# Altium PCB lab2_yakimenko_boost.PcbDoc
Units mm, origin at the board's own origin, x right, y up, seen from the top; angles counter-clockwise.
Board outline 43.1 x 26.1 mm, 2 copper layers (Top Layer, Bottom Layer), stack 1.57 mm thick; 17 components, 10 nets, 53 pads, 67 vias.
Unrouted connection lines stored in the file: 8.
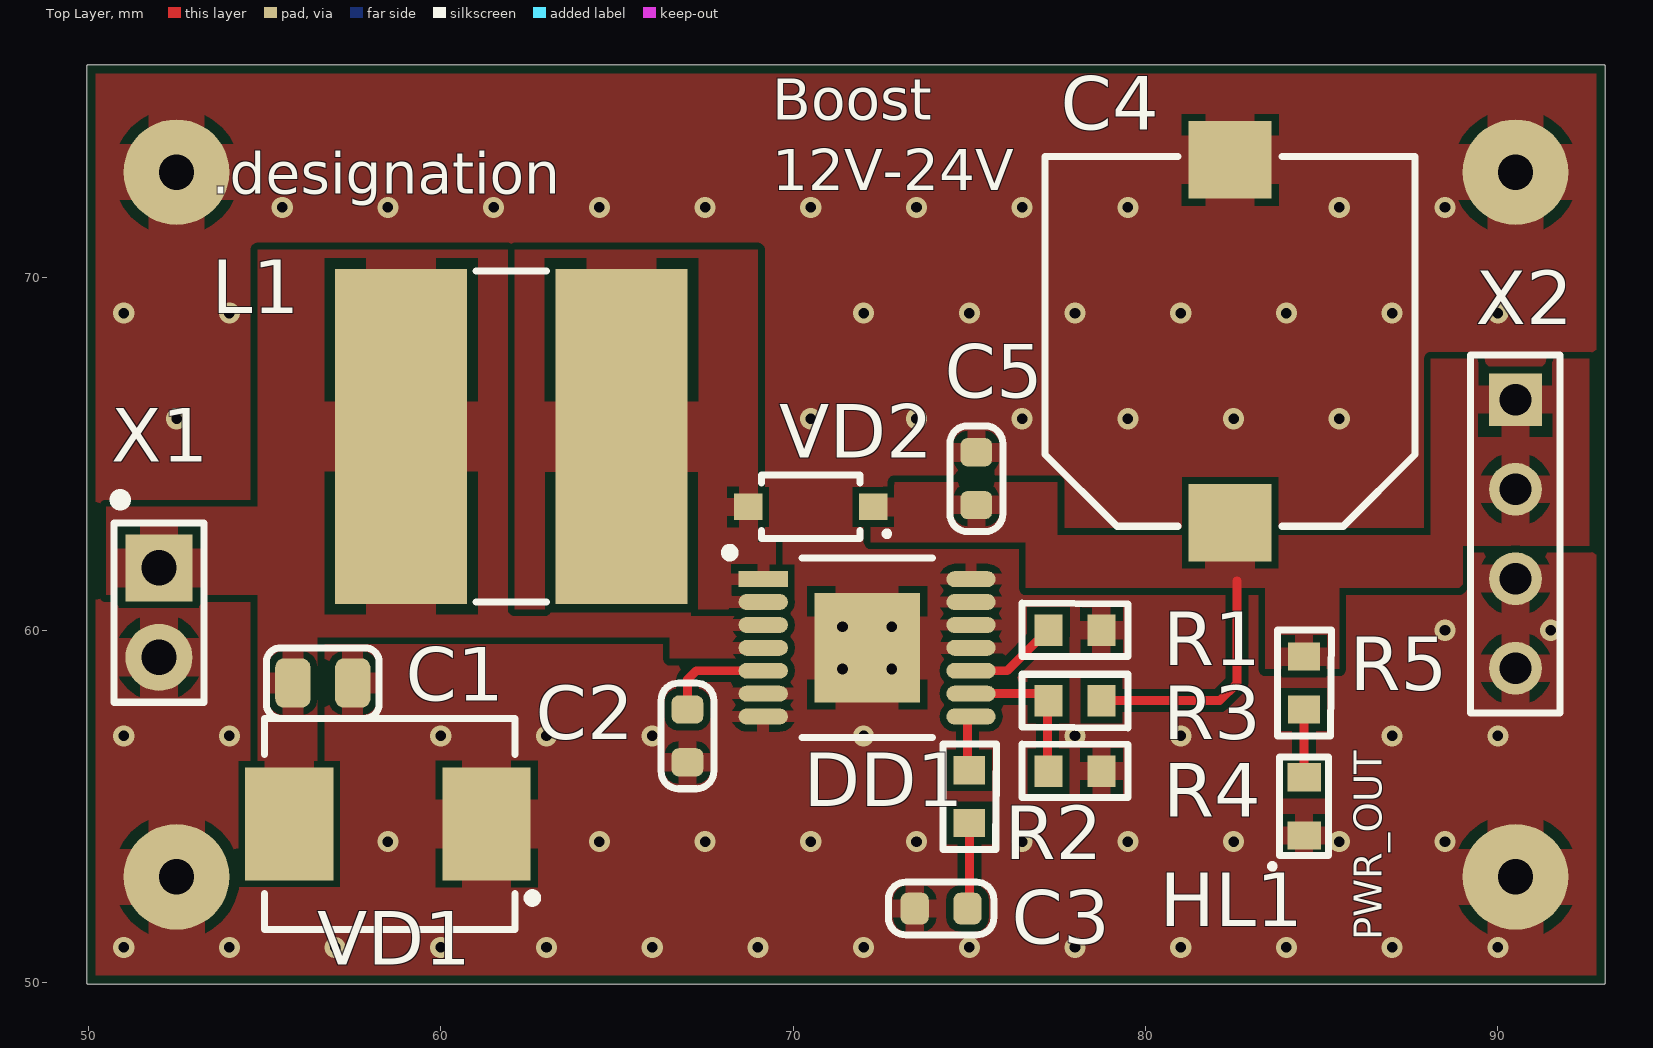
[diagram p0: Top Layer view]
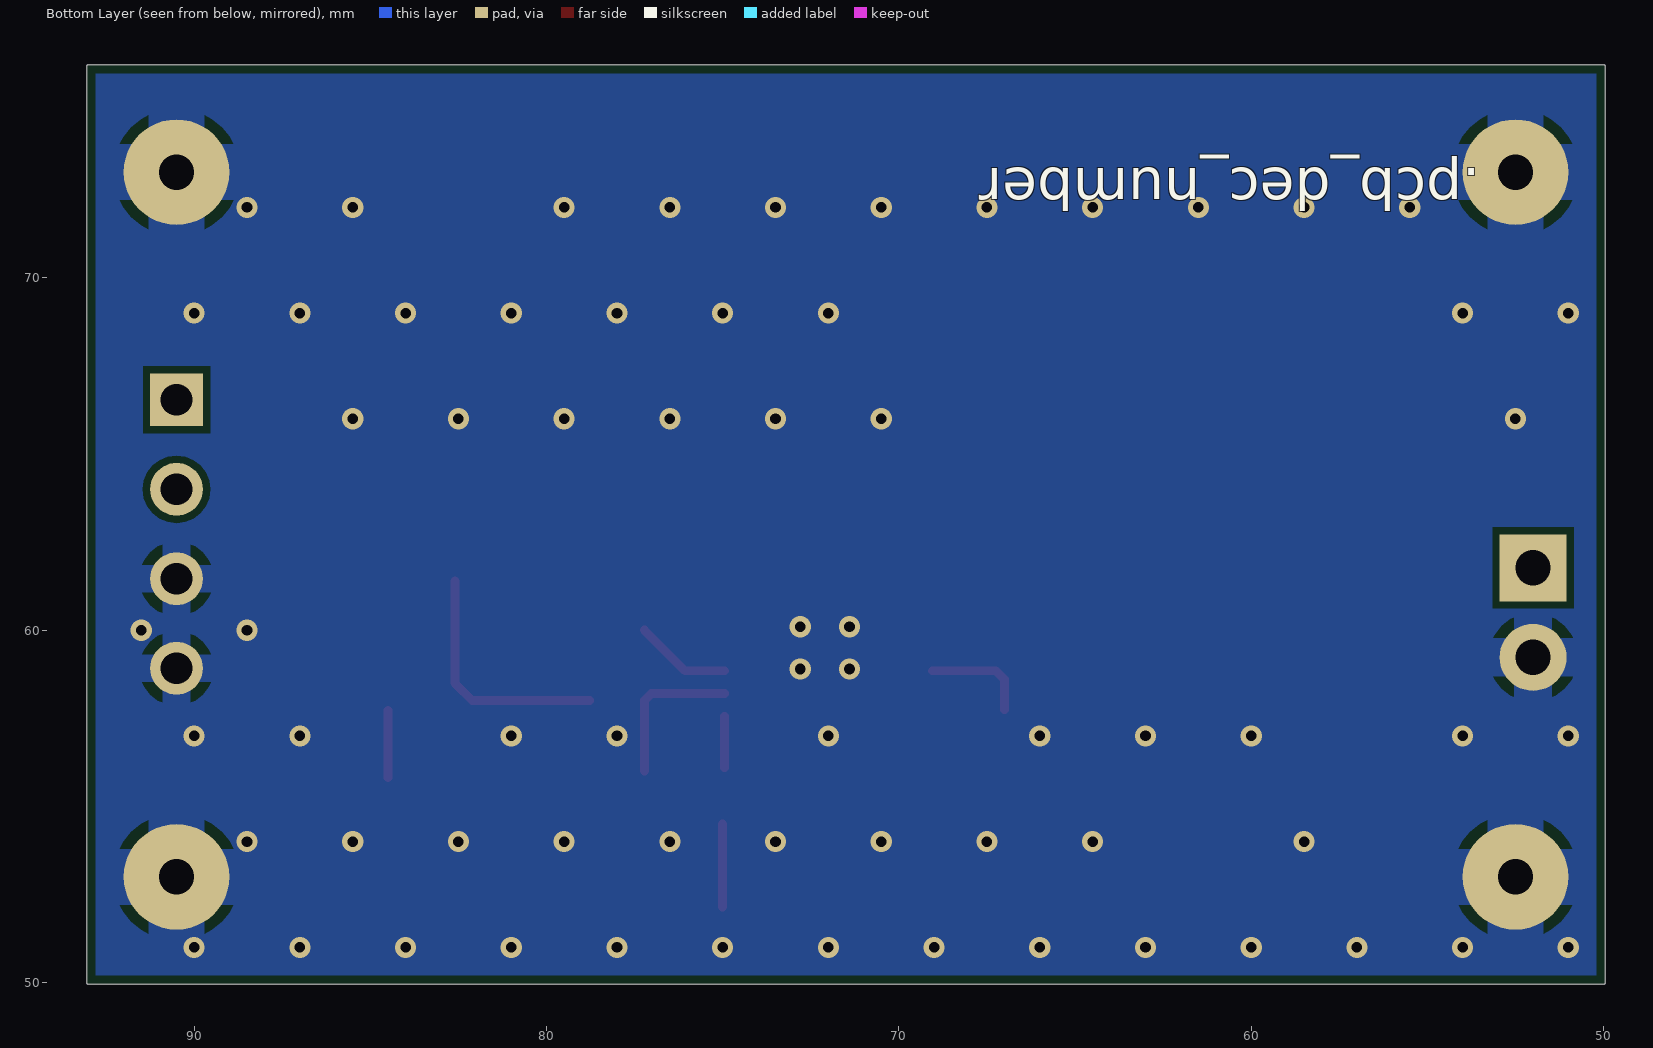
[diagram p1: Bottom Layer view, seen from below]
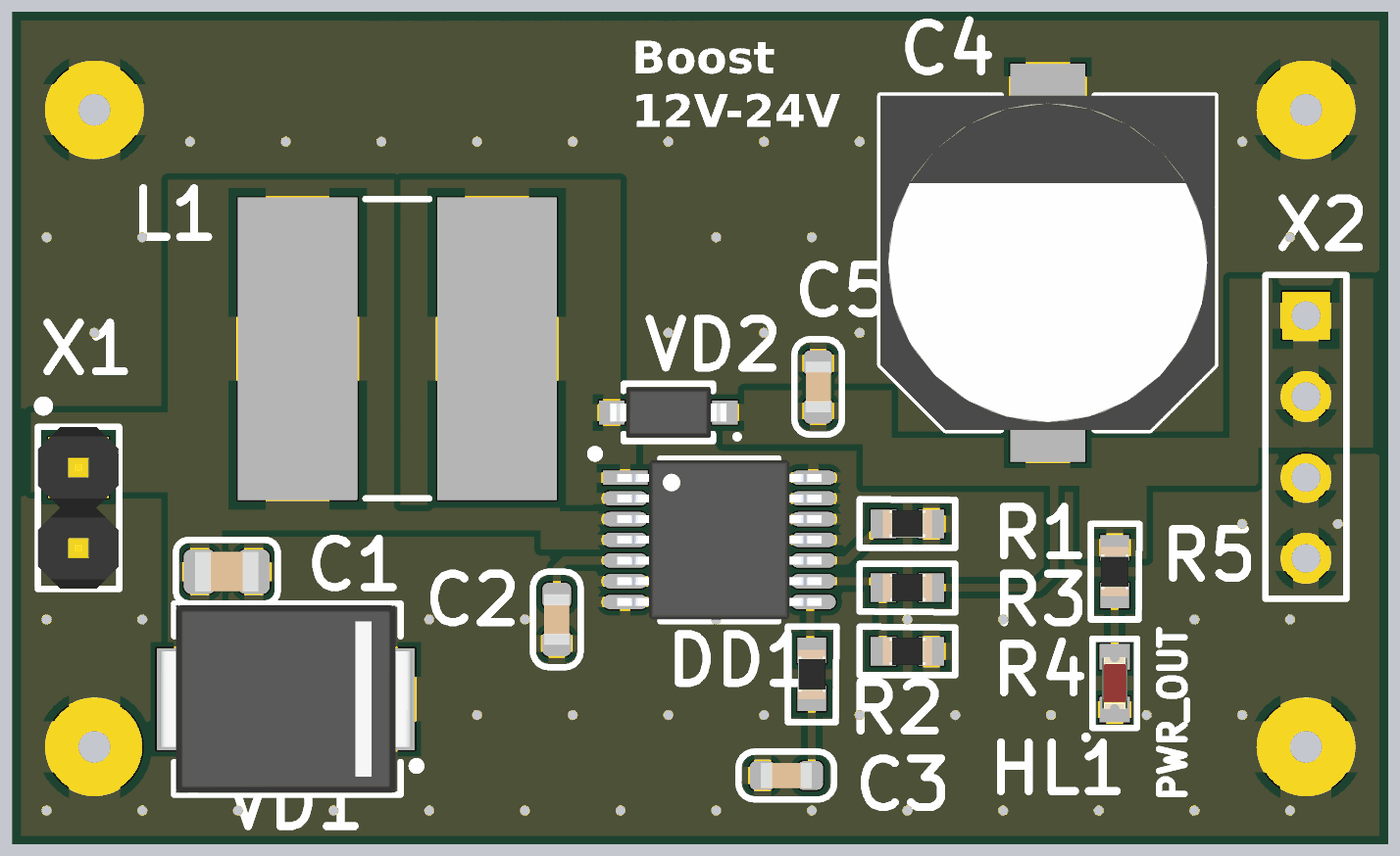
[diagram p2: 3D render of the assembled board from above, using the file's embedded part models]

## Layer stack, top to bottom
Top Solder: solder mask 0.0102, Solder Resist, Dk 3.5
Top Layer: signal copper 0.035
Core 1: core 1.5, FR4, Dk 4.6
Bottom Layer: signal copper 0.035
Bottom Solder: solder mask 0.0102, Solder Resist, Dk 3.5

## Board outline
50,49.95 cw(c50,50) 49.95,50 49.95,76 cw(c50,76) 50,76.05 93,76.05 cw(c93,76) 93.05,76 93.05,50 cw(c93,50) 93,49.95

## Design rules (kind name [scope] priority, off if disabled: settings)
AcuteAngle min_acute_angle [OnCopper] p1: minimum=3.50000000000000E+0001 checktracksonly=FALSE // Минимальный угол между примитивами топологии
BoardOutlineClearance board_outline_clearance_std [NOT (OnLayer('Bottom Overlay') OR OnLayer('Top Overlay'))] p1: gap=0.25 ignorepadtopadclearanceinfootprint=FALSE except(0: Arc-SplitContinuation Track-SplitContinuation SMDPad-SplitContinuation THPad-SplitContinuation Via-SplitContinuation Fill-SplitContinuation Poly-SplitContinuation Region-SplitContinuation Text-SplitContinuation) // Отступ элементов топологии от края фрезеруемой печатной платы
Clearance clearance_outer_35um_std [OnTopLayer OR OnBottomLayer] p1: gap=0.2 ignorepadtopadclearanceinfootprint=TRUE except(0.25: Arc-Hole Track-Hole SMDPad-Hole THPad-Hole Via-Hole Fill-Hole Poly-Hole Region-Hole Text-Hole) // Зазоры на внешних слоях
Clearance clearance_inner_35um_std [NOT (OnTopLayer Or OnBottomLayer)] p2: gap=0.2 ignorepadtopadclearanceinfootprint=FALSE except(0.25: Arc-Hole Track-Hole SMDPad-Hole THPad-Hole Via-Hole Fill-Hole Poly-Hole Region-Hole Text-Hole) // Зазоры на внутренних слоях
ComponentClearance [All] p1: gap=0 collisioncheckmode=3 verticalgap=0 showdistances=FALSE
DiffPairsRouting diff_pairs_routing [All] p1: maxlimit=0.127 minlimit=0.127 mostfreqgap=0.127 toplayer_minwidth=0.143 toplayer_maxwidth=0.143 toplayer_prefwidth=0.143 bottomlayer_minwidth=0.143 bottomlayer_maxwidth=0.143 bottomlayer_prefwidth=0.143 impedanceprofiledriven=TRUE impedanceprofileid={FD46899E-B5A2-4EF5-A302-5D2DB6A51F35} maxuncoupledlength=12.7 // Правила трассировки дифференциальных пар
HoleSize min_hole_size_std [IsPad] p1: absolutevalues=TRUE maxlimit=5.9 minlimit=0.6 maxpercent=80.000 minpercent=20.000 // Диаметр межслойного переходного отверстия
HoleSize min_hole_size_via_std [IsVia] p2: absolutevalues=TRUE maxlimit=5.9 minlimit=0.3 maxpercent=80.000 minpercent=20.000 // Минимальный диаметр монтажного отверстия
HoleToHoleClearance hole_to_hole_clearance_std [All] p1: gap=0.2 allowstackedmicrovias=FALSE // Минимальное расстояние между краями двух отверстий
MinimumAnnularRing min_via_ar_std [All] p1: minimumring=0.15 // Поясок площадки переходного отверстия (Annular ring VIA)
MinimumAnnularRing min_pad_ar_std [All] p2: minimumring=0.2 // Поясок монтажной контактной площадки (Annular ring PAD)
MinimumSolderMaskSliver min_solder_mask_bridge_std [All] p1: minsoldermaskwidth=0.15 // Мнимальная ширина масочного мостика
PlaneClearance plane_clearance_35um_std [All] p1: clearance=0.2 // Отступ полигона (для слоя plane) от элементов топологии
PlaneConnect [All] p1: planeconnectstyle=Relief reliefexpansion=0.5 reliefentries=4 reliefconductorwidth=0.2 reliefairgap=0.2
PolygonConnect poly_connect_to_pad<=0.3 [(AsMM(PadXSize_AllLayers)<=0.301) or (AsMM(PadYSize_AllLayers)<=0.301)] p1: thpad.connectstyle=Relief thpad.reliefconductorwidth=0.2 thpad.reliefentries=4 thpad.polygonreliefangle="90 Angle" thpad.airgapwidth=0.2 smdpad.connectstyle=Relief smdpad.reliefconductorwidth=0.2 smdpad.reliefentries=4 smdpad.polygonreliefangle="90 Angle" smdpad.airgapwidth=0.2 via.connectstyle=Direct via.reliefconductorwidth=0.254 via.reliefentries=4 via.polygonreliefangle="90 Angle" via.airgapwidth=0.254 // Правила подключения полигонов для падов от 0,3мм и меньше
PolygonConnect poly_connect_to_pad<=0.4 [(AsMM(PadXSize_AllLayers)<=0.401) or (AsMM(PadYSize_AllLayers)<=0.401)] p2: thpad.connectstyle=Relief thpad.reliefconductorwidth=0.26 thpad.reliefentries=4 thpad.polygonreliefangle="90 Angle" thpad.airgapwidth=0.2 smdpad.connectstyle=Relief smdpad.reliefconductorwidth=0.26 smdpad.reliefentries=4 smdpad.polygonreliefangle="90 Angle" smdpad.airgapwidth=0.2 via.connectstyle=Direct via.reliefconductorwidth=0.254 via.reliefentries=4 via.polygonreliefangle="90 Angle" via.airgapwidth=0.254 // Правила подключения полигонов для падов от 0,4 и меньше
PolygonConnect poly_connect_to_pad<=0.6 [(AsMM(PadXSize_AllLayers)<=0.601) or (AsMM(PadYSize_AllLayers)<=0.601)] p3: thpad.connectstyle=Relief thpad.reliefconductorwidth=0.33 thpad.reliefentries=4 thpad.polygonreliefangle="90 Angle" thpad.airgapwidth=0.2 smdpad.connectstyle=Relief smdpad.reliefconductorwidth=0.33 smdpad.reliefentries=4 smdpad.polygonreliefangle="90 Angle" smdpad.airgapwidth=0.2 via.connectstyle=Direct via.reliefconductorwidth=0.254 via.reliefentries=4 via.polygonreliefangle="90 Angle" via.airgapwidth=0.254 // Правила подключения полигонов для падов от 0,6мм и меньше
PolygonConnect poly_connect_to_pad<=0.7 [(AsMM(PadXSize_AllLayers)<=0.701) or (AsMM(PadYSize_AllLayers)<=0.701)] p4: thpad.connectstyle=Relief thpad.reliefconductorwidth=0.46 thpad.reliefentries=4 thpad.polygonreliefangle="90 Angle" thpad.airgapwidth=0.2 smdpad.connectstyle=Relief smdpad.reliefconductorwidth=0.46 smdpad.reliefentries=4 smdpad.polygonreliefangle="90 Angle" smdpad.airgapwidth=0.2 via.connectstyle=Direct via.reliefconductorwidth=0.254 via.reliefentries=4 via.polygonreliefangle="90 Angle" via.airgapwidth=0.254 // Правила подключения полигонов для падов от 0,7мм и меньше
PolygonConnect poly_connect_to_pad<=0.8 [(AsMM(PadXSize_AllLayers)<=0.8)or(AsMM(PadYSize_AllLayers)<=0.8)] p5: thpad.connectstyle=Relief thpad.reliefconductorwidth=0.53 thpad.reliefentries=4 thpad.polygonreliefangle="90 Angle" thpad.airgapwidth=0.3 smdpad.connectstyle=Relief smdpad.reliefconductorwidth=0.53 smdpad.reliefentries=4 smdpad.polygonreliefangle="90 Angle" smdpad.airgapwidth=0.2 via.connectstyle=Direct via.reliefconductorwidth=0.254 via.reliefentries=4 via.polygonreliefangle="90 Angle" via.airgapwidth=0.254 // Правила подключения полигонов для падов от 0,8мм и меньше
PolygonConnect poly_connect_to_pad<=1 [(AsMM(PadXSize_AllLayers)<=1.01)or(AsMM(PadYSize_AllLayers)<=1.01)] p6: thpad.connectstyle=Relief thpad.reliefconductorwidth=0.6 thpad.reliefentries=4 thpad.polygonreliefangle="90 Angle" thpad.airgapwidth=0.3 smdpad.connectstyle=Relief smdpad.reliefconductorwidth=0.6 smdpad.reliefentries=4 smdpad.polygonreliefangle="90 Angle" smdpad.airgapwidth=0.2 via.connectstyle=Direct via.reliefconductorwidth=0.254 via.reliefentries=4 via.polygonreliefangle="90 Angle" via.airgapwidth=0.254 // Правила подключения полигонов для падов от 1мм и меньше
PolygonConnect poly_connect_to_pad<=1.3 [(AsMM(PadXSize_AllLayers)<=1.31)or(AsMM(PadYSize_AllLayers)<=1.31)] p7: thpad.connectstyle=Relief thpad.reliefconductorwidth=0.66 thpad.reliefentries=4 thpad.polygonreliefangle="90 Angle" thpad.airgapwidth=0.3 smdpad.connectstyle=Relief smdpad.reliefconductorwidth=0.86 smdpad.reliefentries=4 smdpad.polygonreliefangle="90 Angle" smdpad.airgapwidth=0.2 via.connectstyle=Direct via.reliefconductorwidth=0.254 via.reliefentries=4 via.polygonreliefangle="90 Angle" via.airgapwidth=0.254 // Правила подключения полигонов для падов от 1,3мм и меньше
PolygonConnect poly_connect_to_pad<=1.6 [(AsMM(PadXSize_AllLayers)<=1.61)or(AsMM(PadYSize_AllLayers)<=1.61)] p8: thpad.connectstyle=Relief thpad.reliefconductorwidth=0.8 thpad.reliefentries=4 thpad.polygonreliefangle="90 Angle" thpad.airgapwidth=0.3 smdpad.connectstyle=Relief smdpad.reliefconductorwidth=1 smdpad.reliefentries=4 smdpad.polygonreliefangle="90 Angle" smdpad.airgapwidth=0.2 via.connectstyle=Direct via.reliefconductorwidth=0.254 via.reliefentries=4 via.polygonreliefangle="90 Angle" via.airgapwidth=0.254 // Правила подключения полигонов для падов от 1,6мм и меньше
PolygonConnect poly_connect_to_pad<=1.8 [(AsMM(PadXSize_AllLayers)<=1.8)or(AsMM(PadYSize_AllLayers)<=1.8)] p9: thpad.connectstyle=Relief thpad.reliefconductorwidth=1 thpad.reliefentries=4 thpad.polygonreliefangle="90 Angle" thpad.airgapwidth=0.3 smdpad.connectstyle=Relief smdpad.reliefconductorwidth=1.2 smdpad.reliefentries=4 smdpad.polygonreliefangle="90 Angle" smdpad.airgapwidth=0.2 via.connectstyle=Direct via.reliefconductorwidth=0.254 via.reliefentries=4 via.polygonreliefangle="90 Angle" via.airgapwidth=0.254 // Правила подключения полигонов для падов от 1,8мм и меньше
PolygonConnect poly_connect_to_pad<=2 [(AsMM(PadXSize_AllLayers)<=2.01)or(AsMM(PadYSize_AllLayers)<=2.01)] p10: thpad.connectstyle=Relief thpad.reliefconductorwidth=1.1 thpad.reliefentries=4 thpad.polygonreliefangle="90 Angle" thpad.airgapwidth=0.3 smdpad.connectstyle=Relief smdpad.reliefconductorwidth=1.4 smdpad.reliefentries=4 smdpad.polygonreliefangle="90 Angle" smdpad.airgapwidth=0.2 via.connectstyle=Direct via.reliefconductorwidth=0.254 via.reliefentries=4 via.polygonreliefangle="90 Angle" via.airgapwidth=0.254 // Правила подключения полигонов для падов от 2мм и меньше
PolygonConnect poly_connect_to_pad<=2.3 [(AsMM(PadXSize_AllLayers)<=2.31)or(AsMM(PadYSize_AllLayers)<=2.31)] p11: thpad.connectstyle=Relief thpad.reliefconductorwidth=1.2 thpad.reliefentries=4 thpad.polygonreliefangle="90 Angle" thpad.airgapwidth=0.3 smdpad.connectstyle=Relief smdpad.reliefconductorwidth=1.4 smdpad.reliefentries=4 smdpad.polygonreliefangle="90 Angle" smdpad.airgapwidth=0.2 via.connectstyle=Direct via.reliefconductorwidth=0.254 via.reliefentries=4 via.polygonreliefangle="90 Angle" via.airgapwidth=0.254 // Правила подключения полигонов для падов от 2,3мм и меньше
PolygonConnect poly_connect_to_pad<=2.5 [(AsMM(PadXSize_AllLayers)<=2.51)or(AsMM(PadYSize_AllLayers)<=2.51)] p12: thpad.connectstyle=Relief thpad.reliefconductorwidth=1.2 thpad.reliefentries=4 thpad.polygonreliefangle="90 Angle" thpad.airgapwidth=0.3 smdpad.connectstyle=Relief smdpad.reliefconductorwidth=1.4 smdpad.reliefentries=4 smdpad.polygonreliefangle="90 Angle" smdpad.airgapwidth=0.2 via.connectstyle=Direct via.reliefconductorwidth=0.254 via.reliefentries=4 via.polygonreliefangle="90 Angle" via.airgapwidth=0.254 // Правила подключения полигонов для падов от 2,5мм и меньше
PolygonConnect poly_connect_to_pad<=2.7 [(AsMM(PadXSize_AllLayers)<=2.71)or(AsMM(PadYSize_AllLayers)<=2.71)] p13: thpad.connectstyle=Relief thpad.reliefconductorwidth=1.4 thpad.reliefentries=4 thpad.polygonreliefangle="90 Angle" thpad.airgapwidth=0.3 smdpad.connectstyle=Relief smdpad.reliefconductorwidth=1.6 smdpad.reliefentries=4 smdpad.polygonreliefangle="90 Angle" smdpad.airgapwidth=0.2 via.connectstyle=Direct via.reliefconductorwidth=0.254 via.reliefentries=4 via.polygonreliefangle="90 Angle" via.airgapwidth=0.254 // Правила подключения полигонов для падов от 2,7мм и меньше
PolygonConnect poly_connect_to_pad<=3 [(AsMM(PadXSize_AllLayers)<=3.01)or(AsMM(PadYSize_AllLayers)<=3.01)] p14: thpad.connectstyle=Relief thpad.reliefconductorwidth=1.6 thpad.reliefentries=4 thpad.polygonreliefangle="90 Angle" thpad.airgapwidth=0.3 smdpad.connectstyle=Relief smdpad.reliefconductorwidth=1.8 smdpad.reliefentries=4 smdpad.polygonreliefangle="90 Angle" smdpad.airgapwidth=0.2 via.connectstyle=Direct via.reliefconductorwidth=0.254 via.reliefentries=4 via.polygonreliefangle="90 Angle" via.airgapwidth=0.254 // Правила подключения полигонов для падов от 3мм и меньше
PolygonConnect poly_connect_to_pad<=7 [(AsMM(PadXSize_AllLayers)<7.01)or(AsMM(PadYSize_AllLayers)<=7.01)] p15: thpad.connectstyle=Relief thpad.reliefconductorwidth=2 thpad.reliefentries=4 thpad.polygonreliefangle="90 Angle" thpad.airgapwidth=0.4 smdpad.connectstyle=Relief smdpad.reliefconductorwidth=2 smdpad.reliefentries=4 smdpad.polygonreliefangle="90 Angle" smdpad.airgapwidth=0.3 via.connectstyle=Direct via.reliefconductorwidth=0.254 via.reliefentries=4 via.polygonreliefangle="90 Angle" via.airgapwidth=0.254 // Правила подключения полигонов для падов от 7мм и меньше
PolygonConnect poly_connect_to_pad [All] p16: thpad.connectstyle=Relief thpad.reliefconductorwidth=0.25 thpad.reliefentries=4 thpad.polygonreliefangle="90 Angle" thpad.airgapwidth=0.2 smdpad.connectstyle=Relief smdpad.reliefconductorwidth=0.25 smdpad.reliefentries=4 smdpad.polygonreliefangle="90 Angle" smdpad.airgapwidth=0.2 via.connectstyle=Direct via.reliefconductorwidth=0.25 via.reliefentries=4 via.polygonreliefangle="90 Angle" via.airgapwidth=0.2 // Правила подключения полигонов общие
RoutingCorners [All] p1 off: cornerstyle=45-Degree minsetback=2.5 maxsetback=2.5
RoutingVias [All] p1: holewidth=0.3 width=0.6 viastyle="Through Hole" minholewidth=0.3 minwidth=0.6 maxholewidth=5.9 maxwidth=6.4
SilkToSilkClearance silk_to_silk_clearance_std [All] p1 off: silktosilkclearance=0.15 // Отступ текста шелкографии от других примитивов шелкографии
SilkToSolderMaskClearance silk_to_solder_mask_clearance_std [IsPad] p1 off: minsilkscreentomaskgap=0.15 clearancetoexposedcopper=FALSE // Минимальное расстояние между элементами шелкографии и вскрытой медью
SolderMaskExpansion solder_mask_expansion_std [All] p1: expansion=0.05 // Припуск паяльной масски
UnRoutedNet [All] p1: checkbadconnections=TRUE
Width width_35um_std [All] p1: maxlimit=10 minlimit=0.2 preferedwidth=0.2 checkconnectedcopper=TRUE // Ширина проводников (общая)
19 further rules are at their usual default settings.

## Components (designator, comment, footprint, x,y, rotation, side; value= is the part's Value field where it differs from the comment)
C1 "10 мк" C0805 56.65,58.5 r0 top
C2 "0,047 мк" C0603 67,57 r270 top
C3 "0,01 мк" C0603 74.2,52.1 r180 top
C4 "10 мк" SVPF10M 82.4,68.2 r90 top
C5 "1 мк" C0603 75.2,64.3 r90 top
DD1 "TPS61175PWP" HTSSOP-14 72.1,59.5 r0 top
HL1 "TLMO1000-GS08" HL0603 84.5,55 r90 top
L1 "NPI105C150MTRF" NPI-2-1000X900X540 62,65.5 r0 top
R1 "86,6 к" R0603 78,60 r180 top
R2 "6,34 к" R0603 75,55.275 r90 top
R3 "300 к" R0603 78,58 r0 top
R4 "16,2 к" R0603 78,56 r180 top
R5 "270" R0603 84.5,58.5 r90 top
VD1 "8.0SMDJ18CA" DO-214AB 58.5,54.5 r180 top
VD2 "SS24FL" SOD-123 70.5,63.5 r180 top
X1 "DS1021-1x2SF11-B" DS1021-1X2SF11-B 52,60.5 r270 top
X2 "DS1069-4MRW6XA" HDR1X4 90.5,66.54 r270 top

## Footprints (in the part's own frame and the unit in brackets; to place one, negate y for a bottom-side part, rotate by r counter-clockwise, add the part's x,y. Pads: shape width x height; smd on the part's side, far side on the other; paste and mask are expansions set on the pad)
C0603 [mm] "Chip Capacitor, 2-Leads, Body 1,60x0,80mm, IPC Medium Density"
  rrect50% 0.8x0.9 smd: 1(-0.75,0) 2(0.75,0)
  silkscreen extent -1.5,-0.75 1.5,0.75, body extent -0.8,-0.4 0.8,0.4, height 0.8
C0805 [mm] "Chip Capasitor, 2-Leads, Body 2,00x1,25mm, IPC Medium Density"
  rrect50% 1x1.4 smd: 1(-0.85,0) 2(0.85,0)
  silkscreen extent -1.6,-1 1.6,1, body extent -1,-0.62 1,0.63, height 0.6
DO-214AB [mm] "Molded Diode, 2-Leads, Body 7,94x5,91mm, IPC Medium Density"
  rect 2.5x3.2 smd: 1(-2.8,0) 2(2.8,0)
  silkscreen extent -4.23,-3 3.5,3, body extent -3.95,-2.95 3.95,2.95, height 2.59
DS1021-1X2SF11-B [mm]
  rect 1.9x1.9 hole 1: 1(-1.27,0)
  round 1.9 hole 1: 2(1.27,0)
  silkscreen extent -3.2,-1.28 2.55,1.28, body extent -2.54,-1.27 2.54,1.27, height 8.54
HDR1X4 [mm] "Connector; Header; 4 Position"
  rect 1.5x1.5 hole 0.9: 1(0,0)
  round 1.5 hole 0.9: 2(2.54,0) 3(5.08,0) 4(7.62,0)
  silkscreen extent -1.27,-1.27 8.89,1.27
HL0603 [mm] "Chip Diode, 2-Leads, Body 1,60x0,80mm, IPC Medium Density"
  rect 0.8x0.95 smd: 1(-0.825,0) 2(0.825,0)
  silkscreen extent -1.75,-0.7 1.4,0.95, body extent -0.81,-0.4 0.81,0.4, height 0.6
HTSSOP-14 [mm] "TSOP, 14-Leads, Body 5,00x4,40mm, Pitch 0,65mm, Thermal Pad 3,10x3,00mm, IPC Medium Density"
  rect 3x3.1 smd: 0(0,0)
  rect 1.4x0.45 smd: 1(-2.95,1.95)
  oval 1.4x0.45 smd: 2(-2.95,1.3) 3(-2.95,0.65) 4(-2.95,0) 5(-2.95,-0.65) 6(-2.95,-1.3) 7(-2.95,-1.95) 8(2.95,-1.95) 9(2.95,-1.3) 10(2.95,-0.65) 11(2.95,0) 12(2.95,0.65) 13(2.95,1.3) 14(2.95,1.95)
  silkscreen extent -4.02,-2.55 1.85,2.82, body extent -3.2,-2.5 3.2,2.5, height 1.2
NPI-2-1000X900X540 [mm]
  rect 3.75x9.5 smd: 1(-3.125,0) 2(3.125,0)
  silkscreen extent -1,-4.7 1,4.7, body extent -5,-4.5 5,4.5, height 5.4
R0603 [mm] "Chip Resistor, 2-Leads, Body 1,60x0,80mm, IPC Medium Density"
  rect 0.8x0.9 smd: 1(-0.75,0) 2(0.75,0)
  silkscreen extent -1.5,-0.77 1.5,0.75, body extent -0.77,-0.43 0.78,0.43, height 0.43
SOD-123 [mm] "SODFL, 2-Leads, Body 1,60x3,71mm, IPC Medium Density"
  rect 0.8x0.75 smd: 1(-1.775,0) 2(1.775,0)
  silkscreen extent -2.21,-0.9 1.4,0.9, body extent -1.82,-0.77 1.83,0.78, height 1.5
SVPF10M [mm] "Aluminum Electrolytic Capacitor, Body 10,35x10,30x10,00mm, IPC Low Density"
  rect 2.2x2.35 smd: 1(-5.15,0) 2(5.15,0)
  silkscreen extent -5.25,-5.25 5.25,5.25, body extent -5.25,-5.25 5.25,5.25, height 10

## Part data
C1: library part c0091, "=Описание", HelpURL=https://www.yageo.com/upload/media/product/productsearch/datasheet/mlcc/UPY-GPHC_X5R_4V-to-50V_26.pdf, ID=c0091, Корпус=0805, Наименование=CC0805KRX5R9BB106, Напряжение="50 В", Номинал="10 мк", Номинальное напряжение="50 В", Описание="Конденсатор чип 0805 10 мкФ 50 В ±10 %", Отклонение="±10 %", Производитель="YAGEO Corp.", Рабочие температуры="от –55 °С до +85 °С", Температурный коэффициент емкости=X5R, Фамилия=Паньков
C2: library part c0025, "=Описание", HelpURL=https://www.kemet.com/docfinder.html?Partnumber=C0805C473J3GACTU, ID=c0025, Корпус=0805, Наименование=C0805C473J3GACTU, Напряжение="25 В", Номинал="0,047 мк", Номинальное напряжение="25 В", Описание="Конденсатор чип 0603 33 нФ 16 В ±5 %", Отклонение="±5 %", Производитель=Kemet, Рабочие температуры="от –55 °С до +125 °С", Фамилия=Якименко
C3: library part c0021, "=Описание", HelpURL=https://product.tdk.com/en/search/capacitor/ceramic/mlcc/info?part_no=CGA4C2C0G1H103J060AA, ID=c0021, Корпус=0805, Наименование=CGA4C2C0G1H103J060AA, Напряжение="50 В", Номинал="0,01 мк", Номинальное напряжение="50 В", Описание="Конденсатор чип 0603 10 нФ 100 В ±5 %", Отклонение="±5 %", Производитель=TDK, Рабочие температуры="от –55 °С до +125 °С", Фамилия=Якименко
C4: library part c0114, "=Описание", HelpURL=https://industrial.panasonic.com/content/data/CP/PDF/OS-CON/S_OS-CON_SVPF_e.pdf, ID=c0114, Корпус="6.6 x 6.6 x 5.8", Наименование=50SVPF10M, Напряжение="50 В", Номинал="10 мк", Номинальное напряжение="50 В", Отклонение="±10 %", Производитель=Panasonic, Рабочие температуры="от –55 °С до +125 °С", Температурный коэффициент емкости=-, Фамилия=Якименко
C5: library part c0061, "=Описание", HelpURL=https://www.yageo.com/upload/media/product/productsearch/datasheet/mlcc/UPY-GPHC_X5R_4V-to-50V_26.pdf, ID=c0061, Корпус=0603, Наименование=CC0603KPX5R9BB105, Напряжение="50 В", Номинал="1 мк", Номинальное напряжение="50 В", Описание="Конденсатор чип 0603 1 мкФ 50 В ±10 %", Отклонение="±10 %", Производитель="YAGEO Corp.", Рабочие температуры="от –55 °С до +85 °С", Температурный коэффициент емкости=X5R, Фамилия=Самарин
DD1: library part dd0018, "=Описание", HelpURL=https://www.ti.com/product/TPS61175, ID=dd0018, Входное напряжение="от 2,9 В до 18 В", Выходное напряжение="от 2,9 В до 38 В", Коммутируемый ток="до 3,8 А", Корпус=HTSSOP-14, Наименование=TPS61175PWP, Описание="Повышающий преобразователь напряжения 38 В и 3,8 А", Производитель="Texas Instruments", Рабочие температуры="от -40 °С до +85 °С", Фамилия=Якименко, Частота переключения="от 160 кГц до 2,64 МГц"
HL1: library part hl0002, "=Описание", HelpURL=https://www.vishay.com/leds/list/product-83172/, ID=hl0002, Корпус=0603, Наименование=TLMO1000-GS08, Номинальная длина волны="605 нм", Номинальная сила света="7,5 мкд", Номинальное падение напряжения="1,8 В", Номинальный прямой ток="15 мА", Описание="Светодиод чип 0603 светло-оранжевый", Производитель="Vishay Intertechnology, Inc.", Рабочие температуры="от –40 °С до +100 °С", Рассеиваемая мощность="40 мВт", Фамилия=Ларионов, Цвет="Soft orange"
L1: library part l0014, "=Описание", HelpURL=https://www.niccomp.com/quickBUILDER/QBPN.php?pNumber=NPI105C150MTRF, ID=l0014, Индуктивность="15 мкГн", Корпус="10,0 x 9,0 x 5,4", Максимальное активное сопротивление="80 мОм", Наименование=NPI105C150MTRF, Номинал="15 мкГн", Номинальное активное сопротивление="80 мОм", Номинальный ток (при нагреве на 20 °С/40 °С)="1,5 А", Описание="Катушка индуктивности 15 мкГн ±20 %", Отклонение="±20 %", Производитель="NIC Components Corp.", Рабочее напряжение="не указано", Рабочие температуры="от –40 °С до +85 °С", Резонансная частота="не указано", Ток насыщения="2,27 А", Фамилия=Якименко
R1: library part r0091, "=Описание", HelpURL=https://www.yageo.com/en/Home, ID=r0091, Наименование=RC0201FR-0786K6L, Номинал="82 к", Номинальное напряжение="25 В", Описание="Резистор чип 0603 82 кОм ±1 % 0,1 Вт", Отклонение="±1 %", Производитель="YAGEO Corp.", Рабочие температуры="от –55 °С до +155 °С", Фамилия=Якименко
R2: library part r0054, "=Описание", HelpURL=https://www.vishay.com/docs/20035/dcrcwe3.pdf, ID=r0054, Наименование=CRCW04026K34FKED, Номинал="6,2 к", Номинальное напряжение="50 В", Отклонение="±1 %", Производитель=Vishay-Dale, Рабочие температуры="от –55 °С до +155 °С", Фамилия=Якименко
R3: library part r0112, "=Описание", HelpURL=https://www.yageo.com/upload/media/product/productsearch/datasheet/rchip/PYu-RC_Group_51_RoHS_L_11.pdf, ID=r0112, Корпус=0603, Наименование=RC0603FR-07300KL, Номинал="300 к", Номинальное напряжение="75 В", Номинальный ток="1 А", Описание="Резистор чип 0603 300 кОм ±1 % 0,1 Вт", Отклонение="±1 %", Примечание="Ряд E24", Производитель="YAGEO Corp.", Рабочие температуры="от –55 °С до +155 °С", Фамилия=Паньков
R4: library part r0067, "=Описание", HelpURL=https://www.vishay.com/docs/20035/dcrcwe3.pdf, ID=r0067, Наименование=CRCW040216K2FKED, Номинал="16 к", Номинальное напряжение="50 В", Номинальный ток="1 А", Описание="м ±1 % 0,1 Вт", Отклонение="±1 %", Производитель=VISHAY, Рабочие температуры="от –55 °С до +155 °С", Фамилия=Якименко
R5: library part r0017, "=Описание", HelpURL=https://www.yageo.com/upload/media/product/productsearch/datasheet/rchip/PYu-RC_Group_51_RoHS_L_11.pdf, ID=r0017, Корпус=0603, Наименование=RC0603FR-07270RL, Номинал=270, Номинальное напряжение="75 В", Номинальный ток="1 А", Описание="Резистор чип 0603 270 Ом ±1 % 0,1 Вт", Отклонение="±1 %", Примечание="Ряд E24", Производитель="YAGEO Corp.", Рабочие температуры="от –55 °С до +155 °С", Фамилия=Паньков
VD1: library part vd0004, "=Описание", HelpURL=https://www.littelfuse.com/products/tvs-diodes/surface-mount/8.0smdj.aspx, ID=vd0004, Корпус=DO-214AB, Наименование=8.0SMDJ18CA, Описание="Двунаправленная диодная сборка для подавления помех, 14 В", Производитель="Littelfuse, Inc.", Фамилия=Шкабара
VD2: library part vd0001, "=Описание", HelpURL=https://www.onsemi.com/, ID=vd0001, Импульсное обратное напряжение="40 В", Корпус=SOD123F, Макс допустимый средний прямой ток="2 А", Наименование=SS24FL, Описание="Диод Шотки", Пиковое прямое напряжение="0,55 В", Производитель="Fairchild Semiconductor", Рабочие температуры="от –65 °С до +125 °С", Фамилия=Якименко
X1: library part x0009, "=Описание", Contact_1=+12V, Contact_2=GND, HelpURL=http://en.connfly.group/product/xVkr=EusQssAN0gN=Aos=mU+UrVkR9kqEAN0gN9g+WqANB+A, ID=x0009, Наименование=DS1021-1x2SF11-B, Описание="PLS 2 pin 2,54 мм вилка прямой", Производитель="Connfly Electronic Co. LTD.", Фамилия=Паньков
X2: library part x0020, "=Описание", Contact_1=+24V, Contact_2=+24V, Contact_3=GND, Contact_4=GND, HelpURL=http://en.connfly.group/product/xVkr=EusQssAN0gN=Aos=mU+UrVkR9kqEAN0gN0MUR+g+NB+A, ID=x0020, Наименование=DS1069-4MRW6XA, Описание="CWF 4 pin Type A 2,5 мм вилка угловой", Производитель="Connfly Electronic Co. LTD.", Фамилия=Паньков

## Free pads (board coordinates)
  round 3 hole 1: 5(52.5,53) 5(52.5,73) 5(90.5,53) 5(90.5,73)

## Via types
v1: diameter 0.6, hole 0.3, Top Layer to Bottom Layer, tented both sides, 67 vias

## Nets (pads, with @x,y where several pads share a name; then routed paths per layer and width w, separated by ;. In a path a pad name is that pad's centre, name@x,y a point inside that pad or via, vN(x,y) a via of type N, cw(c..) or ccw(c..) an arc to the next point about the centre after c; other vN are vias at no path point)
AGND: C1.2 C2.2 C3.2 C4.2 C5.2 DD1.0 DD1.6 DD1.7 DD1.11 DD1.12 DD1.13 DD1.14 HL1.1 pad.5 R1.1 R4.1 VD1.1 X1.2 X2.3 X2.4
  other v1: 51,51 54,51 57,51 60,51 63,51 66,51 69,51 72,51 75,51 78,51 81,51 84,51 87,51 90,51 58.5,54 64.5,54 67.5,54 70.5,54 73.5,54 76.5,54 79.5,54 82.5,54 85.5,54 88.5,54 51,57 54,57 60,57 63,57 66,57 72,57 78,57 81,57 87,57 90,57 71.4,58.9 72.8,58.9 88.5,60 91.5,60 71.4,60.1 72.8,60.1 52.5,66 70.5,66 73.5,66 76.5,66 79.5,66 82.5,66 85.5,66 51,69 54,69 72,69 75,69 78,69 81,69 84,69 87,69 90,69 55.5,72 58.5,72 61.5,72 64.5,72 67.5,72 70.5,72 73.5,72 76.5,72 79.5,72 85.5,72 88.5,72
FB: DD1.9 R3.1 R4.2 | length 6.4
  Top Layer w0.254: R4.2@77.225,56 77.225,58 R3.1@77.025,58.2 ; DD1.9 R3.1@77.025,58.2 ; DD1.9 R3.1@77.025,58.2 ; DD1.9 74.95,58.2 DD1.9
NetC1_1: C1.1 DD1.3 DD1.4 L1.1 VD1.2 X1.1
NetC2_1: C2.1 DD1.5 | length 3
  Top Layer w0.254: C2.1 67,58.6 67.25,58.85 DD1.5@69.05,58.85
NetC3_1: C3.1 R2.1 | length 2.4
  Top Layer w0.254: C3.1@75,52.15 R2.1@75,54.5
NetC4_1: C4.1 C5.1 R3.2 R5.2 VD2.1 X2.1 X2.2 | length 6.9
  Top Layer w0.254: R3.2@78.775,58 82.1,58 82.6,58.5 82.6,61.4
NetDD1_8: DD1.8 R2.2 | length 1.5
  Top Layer w0.254: R2.2@74.95,56.1 74.95,57.45 DD1.8@74.95,57.55
NetDD1_10: DD1.10 R1.2 | length 2.8
  Top Layer w0.254: DD1.10@74.95,58.85 DD1.10 76.075,58.85 R1.2@77.225,60
NetHL1_2: HL1.2 R5.1 | length 1.9
  Top Layer w0.254: HL1.2 R5.1@84.5,57.725
SW: DD1.1 DD1.2 L1.2 VD2.2

## Polygon pours and split planes (outlines as drawn)
AGND on Top Layer "Top Layer-AGND 1" (solid, pour order 72): 50,76 50,50 93,50 93,76
NetC4_1 on Top Layer "Top Layer-NetC4_1" (solid, pour order 58): 72.2,64.2 77.5,64.2 77.5,62.7 88.1,62.7 88.1,67.7 92.6,67.7 92.6,62.4 89,62.4 89,61.3 88.9,61.2 85.5,61.2 85.5,58.9 83.4,58.9 83.4,61.2 76.6,61.2 76.6,62.5 72.2,62.5
SW on Top Layer "Top Layer-SW" (solid, pour order 50): 62.1,70.8 62.1,60.6 69.5,60.6 69.5,62.5 69,62.5 69,70.8
AGND on Top Layer "Top Layer-AGND" (solid, pour order 64): 65.9,56.9 68,56.9 68.2,57.1 68.2,58.5 70,58.5 70,61.7 70.1,61.6 74,61.6 74,59.8 78.2,59.8 78.2,61.1 81.4,61.1 81.4,50.2 70.3,50.2 70.3,53.8 65.9,53.8
NetC1_1 on Top Layer "Top Layer-NetC1_1" (solid, pour order 54): 54.8,70.8 54.8,63.5 50.5,63.5 50.5,61 54.8,61 54.8,52.5 56.5,52.5 56.5,59.8 66.5,59.8 66.5,59.2 69.4,59.2 69.4,60.4 67.1,60.4 67.1,60.5 61.9,60.5 61.9,70.8
no net on Top Layer "Top Layer-No Net" (solid, pour order 62): 65.9,56.9
no net on Top Layer "Top Layer-No Net 1" (solid, pour order 60): 65.9,56.5
no net on Top Layer "Top Layer-No Net 3" (solid, pour order 34): 75,64.5
AGND on Bottom Layer "Bottom Layer-GND" (solid, pour order 70): 50,76 93,76 93,50 50,50
AGND on Bottom Layer "Bottom Layer-AGND" (solid, pour order 68): 65.9,53.8 70.3,53.8 70.3,50.2 83.2,50.2 83.2,61.1 83.1,61 75.8,61 75.8,58 65.9,58

## Silkscreen, mask and mechanical layers (free items; w line width, h text height)
Top Overlay:
  text "Boost / 12V-24V" at 69.4,72.1 h2
  text ".designation" at 53.5,72 h2
  text "PWR_OUT" at 86.7,51.2 h0.8 r90
Bottom Overlay:
  text ".pcb_dec_number" at 53.5,73.5 h2 r180
Board:
  lines w0.1: 50,51.5 50,61.5 ; 54.125,50 80.375,50 ; 63.125,50 50,50 ; 66.5,50 93,50 ; 75,50 50,50 ; 80.875,50 93,50 ; 50,50 50,76 56.375,76 68.875,76 75.125,76 93,76 93,62.25 93,50
Assembly Notes (Mech5):
  text "'.title'" at 50,47.6 h2
  text "'.project'_'.pcb_dec_number'['.Pcb_File_Name_No_Path']" at 50,45 h2